# EAGLE board SparkFun_GPS_ZED-F9K-Panel (EAGLE 9.6.2), part 1 of 3
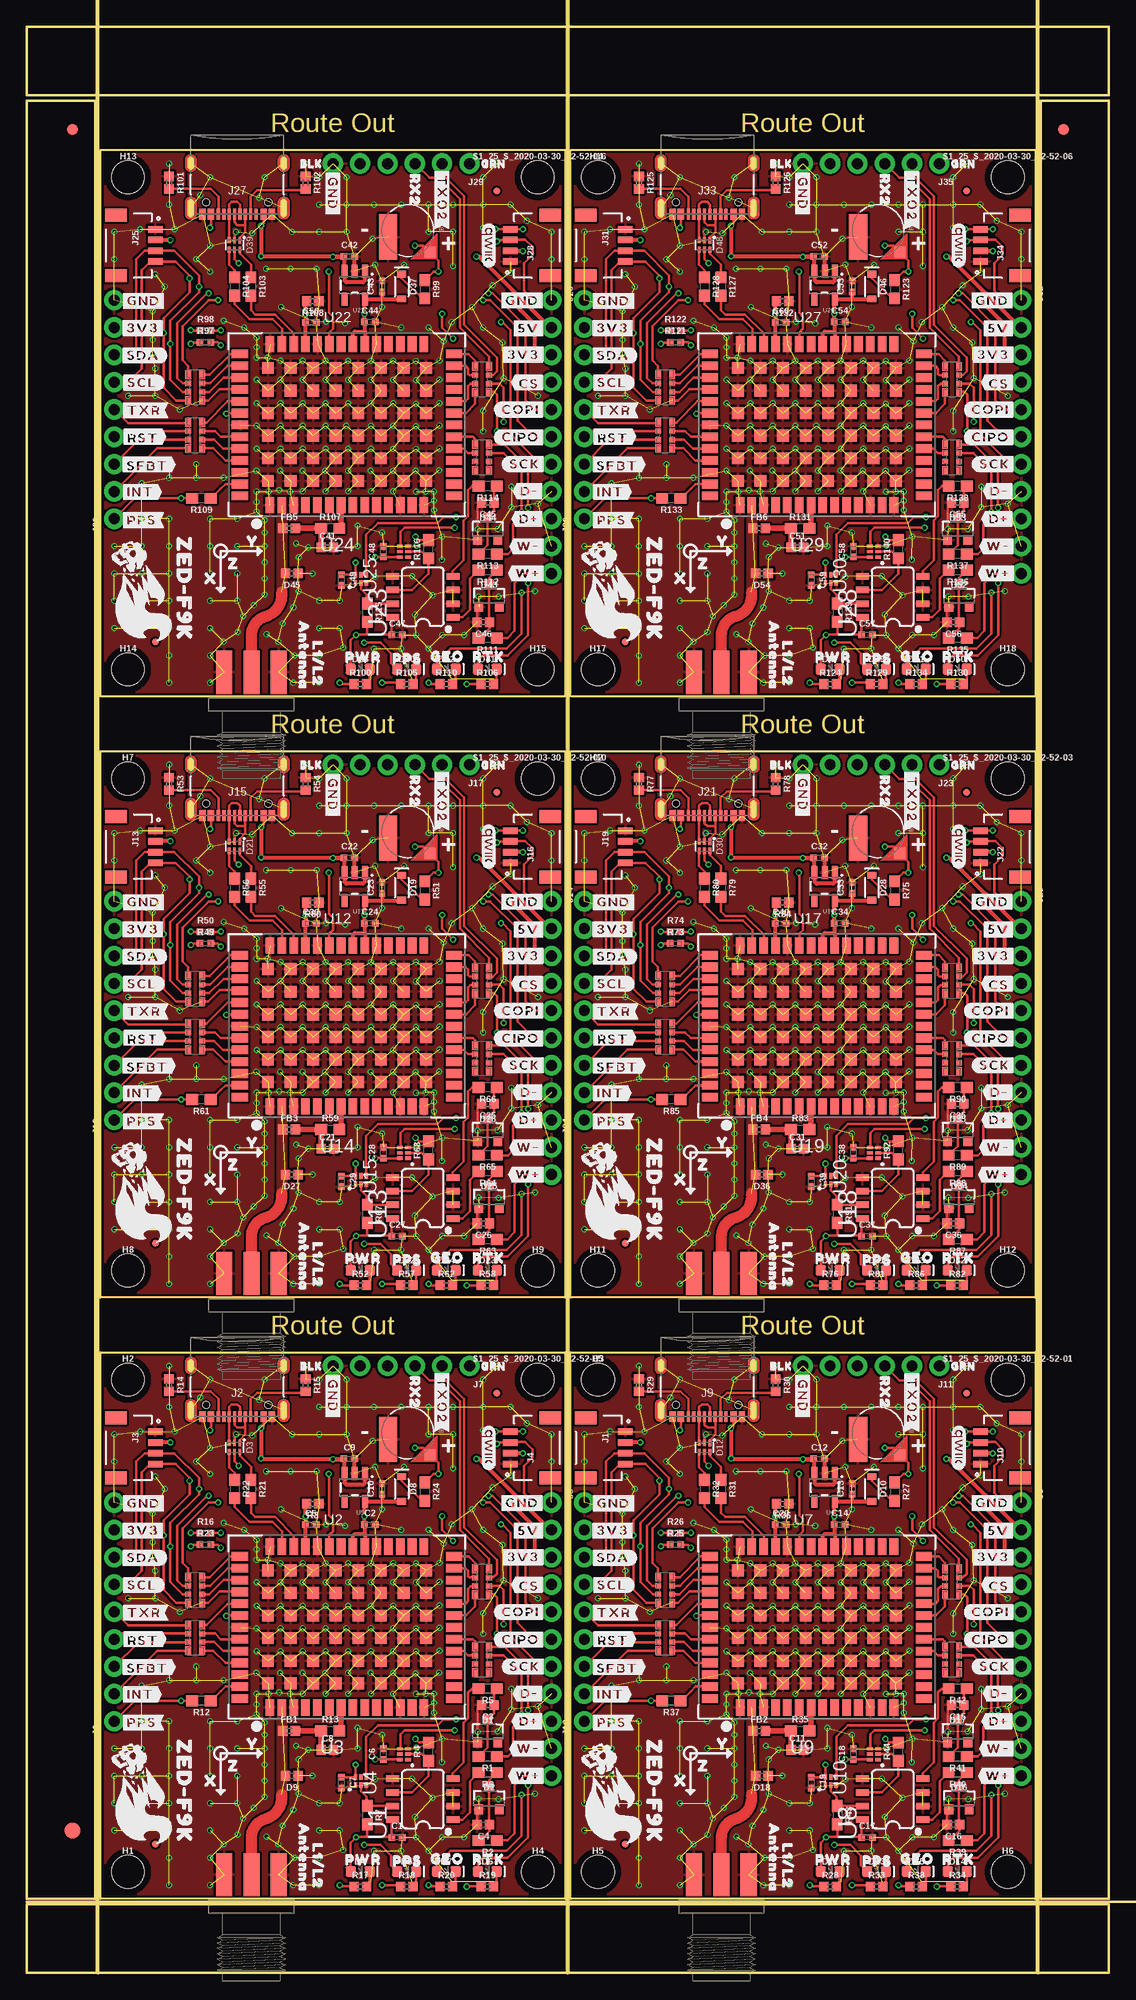
[diagram p0: board, top side]
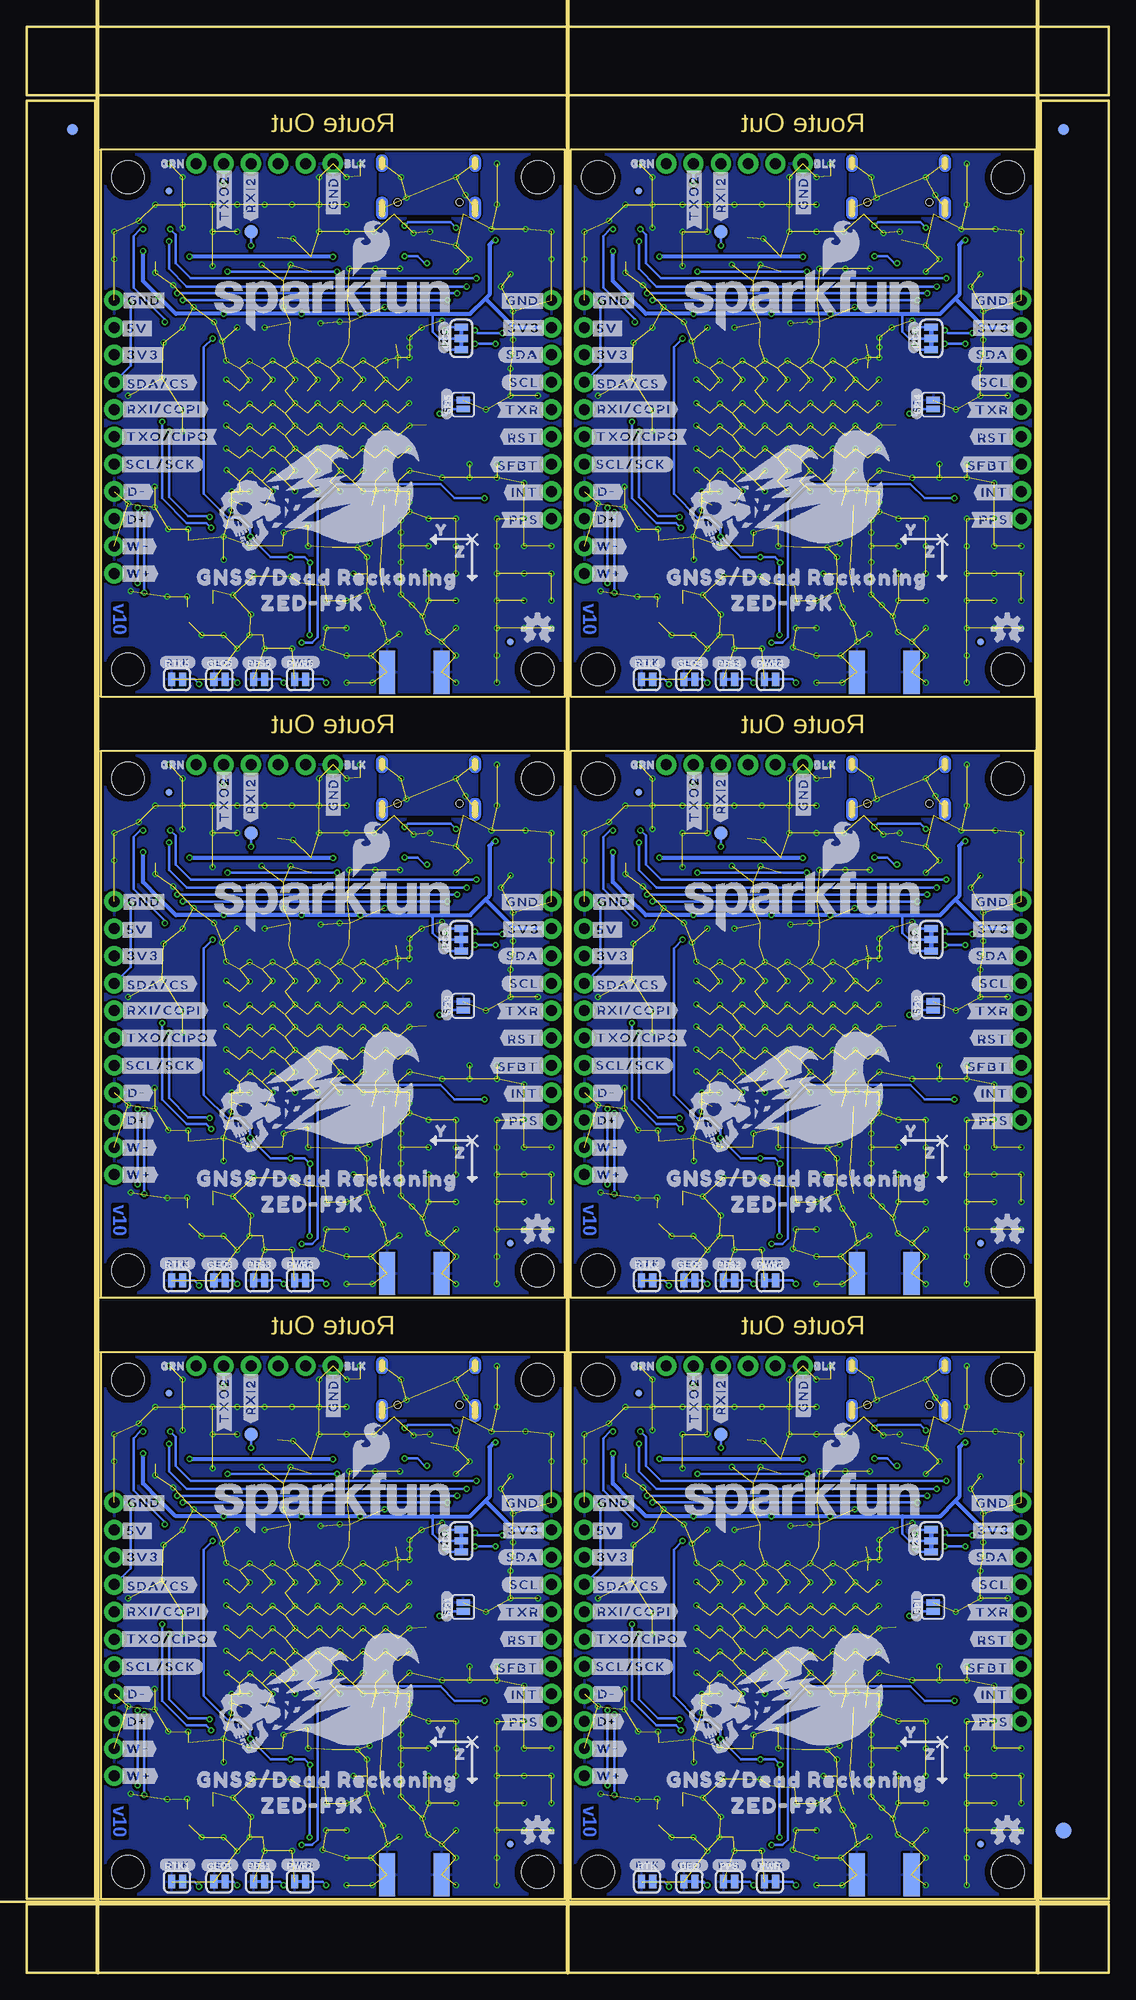
[diagram p1: board, bottom side, seen from below]

Size 100.58 x 180.85 mm. Coordinates in mm from the lower left corner, seen from the top.
Outline: 6.86,6.86 6.86,57.66 50.04,57.66 50.04,6.86 6.86,6.86
Outline: 50.55,6.86 50.55,57.66 93.73,57.66 93.73,6.86 50.55,6.86
Outline: 6.86,62.74 6.86,113.54 50.04,113.54 50.04,62.74 6.86,62.74
Outline: 50.55,62.74 50.55,113.54 93.73,113.54 93.73,62.74 50.55,62.74
Outline: 6.86,118.62 6.86,169.42 50.04,169.42 50.04,118.62 6.86,118.62
Outline: 50.55,118.62 50.55,169.42 93.73,169.42 93.73,118.62 50.55,118.62
Outline: 0,6.35 100.58,6.35 100.58,0 0,0 0,6.35
Outline: 94.23,173.99 100.58,173.99 100.58,6.86 94.23,6.86 94.23,173.99
Outline: 0,180.85 100.58,180.85 100.58,174.5 0,174.5 0,180.85
Outline: 0,173.99 6.35,173.99 6.35,6.86 0,6.86 0,173.99
Copper layers (1*16): Top 0.035mm / dielectric 1.5mm / Bottom 0.035mm
Design rules "SparkFun_GPS_ZED-F9K": minimum track width 5mil, minimum drill 0.3mm, track to track 5mil, track to pad 5mil, pad to pad 5mil, via to via 5mil, smd to smd 5mil, copper to edge 7mil, drill to drill 7mil, minimum pad ring 5mil, minimum via ring 5mil, stop-mask expansion 2.5mil, vias tented up to drill 25mil, thermal gap 10mil
Net classes: 1 Antenna: width 1 mm, clearance 0.3 mm
Milling: 4 lines

## Footprints (pad centres in the part's own frame; a part is rotated, then mirrored left to right if it is on the bottom)
STAND-OFF-TIGHT = hole 3.048: 0,0
ML414H_IV01E = smd 1 x 1: + 2.022,2.032 | smd 4.2 x 1.7: - 0.6,-1.85
0402-TIGHT = smd 0.6 x 0.6: 1 -0.5,0; 2 0.5,0
0402 = smd 0.85 x 0.9: 1 -0.58,0; 2 0.58,0
SOT23-3 = smd 0.8 x 0.9: 1 -0.95,-1; 2 0.95,-1; 3 0,1.1
SOT886 = smd 0.61 x 0.25: 1 -0.405,0.5 | smd 0.56 x 0.25: 2 -0.43,0; 3 -0.43,-0.5; 4 0.43,-0.5; 5 0.43,0; 6 0.43,0.5
LED-0603 = smd 1 x 1: A -0.877,0; C 0.877,0
SOD-323 = smd 0.63 x 0.83: A 1.15,0; C -1.15,0
SMA-EDGE = smd 1.5 x 4: GND@0 -2.54,0; GND@1 2.54,0; SIG 0,0 | smd 1.5 x 4 bottom: GND@2 -2.54,0; GND@3 2.54,0
FIDUCIAL-1X2 = smd 1 x 1: 1 0,0
FIDUCIAL-1.5X3 = smd 1.5 x 1.5: 1 0,0
FIDUCIAL-MICRO = smd 0.635 x 0.635: 1 0,0
SMT-JUMPER_2_NC_TRACE_SILK = smd 0.66 x 1.27: 1 -0.521,0; 2 0.521,0
SMT-JUMPER_3_2-NC_TRACE_SILK = smd 0.66 x 1.27: 1 -1.041,0; 2 0,0; 3 1.041,0
JST04_1MM_RA = smd 0.6 x 1.35: 1 -1.5,0; 2 -0.5,0; 3 0.5,0; 4 1.5,0 | smd 1.2 x 2: NC1 2.8,-3.675; NC2 -2.8,-3.675
USB-C-16P-2LAYER-PADS = smd 0.3 x 1: A5 -1.25,-0.34; A6 -0.25,-0.34; A7 0.25,-0.34; A8 1.25,-0.34; B5 1.75,-0.34; B6 0.75,-0.34; B7 -0.75,-0.34; B8 -1.75,-0.34 | smd 0.6 x 1: GND -3.225,-0.34; GND2 3.225,-0.34; VBUS1 -2.45,-0.34; VBUS2 2.45,-0.34 | drill 0.4 pad 0.6 long: SHLD1 -4.318,-0.915; SHLD2 4.318,-0.915; SHLD3 -4.318,-5.095; SHLD4 4.318,-5.095 | hole 0.65: -2.89,-1.445; 2.89,-1.445
1X11_NO_SILK = drill 1.016 pad 1.88: 1 0,0; 2 2.54,0; 3 5.08,0; 4 7.62,0; 5 10.16,0; 6 12.7,0; 7 15.24,0; 8 17.78,0; 9 20.32,0; 10 22.86,0; 11 25.4,0
1X09_NO_SILK = drill 1.016 pad 1.88: 1 0,0; 2 2.54,0; 3 5.08,0; 4 7.62,0; 5 10.16,0; 6 12.7,0; 7 15.24,0; 8 17.78,0; 9 20.32,0
1X06_NO_SILK = drill 1.016 pad 1.88: 1 0,0; 2 2.54,0; 3 5.08,0; 4 7.62,0; 5 10.16,0; 6 12.7,0
0603 = smd 1.1 x 1: 1 -0.85,0; 2 0.85,0
1206_RA = smd 0.8 x 0.55: P1 -1.2,-0.62; P4 1.2,-0.62; P5 1.2,0.68; P8 -1.2,0.68 | smd 0.5 x 0.55: P2 -0.4,-0.62; P3 0.4,-0.62; P6 0.4,0.68; P7 -0.4,0.68
SMT-JUMPER_2_NO_SILK = smd 0.635 x 1.27: 1 -0.406,0; 2 0.406,0
PAD.03X.05 = smd 1.27 x 1.27: 1 0,0
SO08 = smd 0.6 x 1.2: 1 -1.905,-2.8; 2 -0.635,-2.8; 3 0.635,-2.8; 4 1.905,-2.8; 5 1.905,2.8; 6 0.635,2.8; 7 -0.635,2.8; 8 -1.905,2.8
UBLOX_ZED_F9K = smd 1.1 x 1.1: G1 -7.312,-5.37; G2 -5.212,-5.37; G3 -3.112,-5.37; G4 -1.012,-5.37; G5 1.088,-5.37; G6 3.188,-5.37; G7 5.288,-5.37; G8 7.388,-5.37; G9 7.388,-3.27; G10 5.288,-3.27; G11 3.188,-3.27; G12 1.088,-3.27; G13 -1.012,-3.27; G14 -3.112,-3.27; G15 -5.212,-3.27; G16 -7.312,-3.27; G17 -7.312,-1.17; G18 -5.212,-1.17; G19 -3.112,-1.17; G20 -1.012,-1.17; G21 1.088,-1.17; G22 3.188,-1.17; G23 5.288,-1.17; G24 7.388,-1.17; G25 7.388,0.93; G26 5.288,0.93; G27 3.188,0.93; G28 1.088,0.93; G29 -1.012,0.93; G30 -3.112,0.93; G31 -5.212,0.93; G32 -7.312,0.93; G33 -7.312,3.03; G34 -5.212,3.03; G35 -3.112,3.03; G36 -1.012,3.03; G37 1.088,3.03; G38 3.188,3.03; G39 5.288,3.03; G40 7.388,3.03; G41 7.388,5.13; G42 5.288,5.13; G43 3.188,5.13; G44 1.088,5.13; G45 -1.012,5.13; G46 -3.112,5.13; G47 -5.212,5.13; G48 -7.312,5.13 | smd 0.8 x 1.5: P1 -7.112,-7.62; P2 -6.012,-7.62; P3 -4.912,-7.62; P4 -3.812,-7.62; P5 -2.712,-7.62; P6 -1.612,-7.62; P7 -0.512,-7.62; P8 0.588,-7.62; P9 1.688,-7.62; P10 2.788,-7.62; P11 3.888,-7.62; P12 4.988,-7.62; P13 6.088,-7.62; P14 7.188,-7.62; P28 7.188,7.33; P29 6.088,7.33; P30 4.988,7.33; P31 3.888,7.33; P32 2.788,7.33; P33 1.688,7.33; P34 0.588,7.33; P35 -0.512,7.33; P36 -1.612,7.33; P37 -2.712,7.33; P38 -3.812,7.33; P39 -4.912,7.33; P40 -6.012,7.33; P41 -7.112,7.33 | smd 1.5 x 0.8: P15 9.988,-6.77; P16 9.988,-5.67; P17 9.988,-4.57; P18 9.988,-3.47; P19 9.988,-2.37; P20 9.988,-1.27; P21 9.988,-0.17; P22 9.988,0.93; P23 9.988,2.03; P24 9.988,3.13; P25 9.988,4.23; P26 9.988,5.33; P27 9.988,6.43; P42 -9.912,6.43; P43 -9.912,5.33; P44 -9.912,4.23; P45 -9.912,3.13; P46 -9.912,2.03; P47 -9.912,0.93; P48 -9.912,-0.17; P49 -9.912,-1.27; P50 -9.912,-2.37; P51 -9.912,-3.47; P52 -9.912,-4.57; P53 -9.912,-5.67; P54 -9.912,-6.77
SIP6 = smd 0.3 x 0.52: P1 -0.508,-0.381; P2 -0.008,-0.381; P3 0.492,-0.381; P4 0.492,0.369; P5 -0.008,0.369; P6 -0.508,0.369
SOT23-5 = smd 0.55 x 1.2: 1 -0.95,-1.3; 2 0,-1.3; 3 0.95,-1.3; 4 0.95,1.3; 5 -0.95,1.3

## Placement (x,y rotation side)
$1_25_$_2020-03-30_22-52-01  STAND-OFFTIGHT  [STAND-OFF-TIGHT]  91.19,55.12 0 top
$1_25_$_2020-03-30_22-52-02  STAND-OFFTIGHT  [STAND-OFF-TIGHT]  47.5,111 0 top
$1_25_$_2020-03-30_22-52-03  STAND-OFFTIGHT  [STAND-OFF-TIGHT]  91.19,111 0 top
$1_25_$_2020-03-30_22-52-04  STAND-OFFTIGHT  [STAND-OFF-TIGHT]  47.5,166.88 0 top
$1_25_$_2020-03-30_22-52-05  STAND-OFFTIGHT  [STAND-OFF-TIGHT]  47.5,55.12 0 top
$1_25_$_2020-03-30_22-52-06  STAND-OFFTIGHT  [STAND-OFF-TIGHT]  91.19,166.88 0 top
BT1  ML414H_IV01E_BATTERY  [ML414H_IV01E]  35.43,50.16 270 top
BT2  ML414H_IV01E_BATTERY  [ML414H_IV01E]  79.12,50.16 270 top
BT3  ML414H_IV01E_BATTERY  [ML414H_IV01E]  35.43,106.05 270 top
BT4  ML414H_IV01E_BATTERY  [ML414H_IV01E]  79.12,106.05 270 top
BT5  ML414H_IV01E_BATTERY  [ML414H_IV01E]  35.43,161.93 270 top
BT6  ML414H_IV01E_BATTERY  [ML414H_IV01E]  79.12,161.93 270 top
C1  0.1uF  [0402-TIGHT]  34.42,12.57 0 top
C2  1.0uF  [0402-TIGHT]  31.88,41.66 0 top
C3  1nF  [0402]  42.84,24.87 180 top
C4  1nF  [0402]  42.43,13.75 180 top
C5  0.1uF  [0402-TIGHT]  26.39,41.63 0 top
C6  0.1uF  [0402-TIGHT]  33.15,20.32 90 top
C7  0.1uF  [0402-TIGHT]  29.24,17.66 270 top
C8  47pF  [0402]  27.94,20.7 0 top
C9  1.0uF  [0402-TIGHT]  29.97,47.75 0 top
C10  1.0uF  [0402-TIGHT]  33.02,44.96 90 top
C11  47pF  [0402]  71.63,20.7 0 top
C12  1.0uF  [0402-TIGHT]  73.66,47.75 0 top
C13  1.0uF  [0402-TIGHT]  76.71,44.96 90 top
C14  1.0uF  [0402-TIGHT]  75.56,41.66 0 top
C15  1nF  [0402]  86.53,24.87 180 top
C16  1nF  [0402]  86.12,13.75 180 top
C17  0.1uF  [0402-TIGHT]  78.11,12.57 0 top
C18  0.1uF  [0402-TIGHT]  76.84,20.32 90 top
C19  0.1uF  [0402-TIGHT]  72.92,17.66 270 top
C20  0.1uF  [0402-TIGHT]  70.08,41.63 0 top
C21  47pF  [0402]  27.94,76.58 0 top
C22  1.0uF  [0402-TIGHT]  29.97,103.63 0 top
C23  1.0uF  [0402-TIGHT]  33.02,100.84 90 top
C24  1.0uF  [0402-TIGHT]  31.88,97.54 0 top
C25  1nF  [0402]  42.84,80.75 180 top
C26  1nF  [0402]  42.43,69.63 180 top
C27  0.1uF  [0402-TIGHT]  34.42,68.45 0 top
C28  0.1uF  [0402-TIGHT]  33.15,76.2 90 top
C29  0.1uF  [0402-TIGHT]  29.24,73.54 270 top
C30  0.1uF  [0402-TIGHT]  26.39,97.51 0 top
C31  47pF  [0402]  71.63,76.58 0 top
C32  1.0uF  [0402-TIGHT]  73.66,103.63 0 top
C33  1.0uF  [0402-TIGHT]  76.71,100.84 90 top
C34  1.0uF  [0402-TIGHT]  75.56,97.54 0 top
C35  1nF  [0402]  86.53,80.75 180 top
C36  1nF  [0402]  86.12,69.63 180 top
C37  0.1uF  [0402-TIGHT]  78.11,68.45 0 top
C38  0.1uF  [0402-TIGHT]  76.84,76.2 90 top
C39  0.1uF  [0402-TIGHT]  72.92,73.54 270 top
C40  0.1uF  [0402-TIGHT]  70.08,97.51 0 top
C41  47pF  [0402]  27.94,132.46 0 top
C42  1.0uF  [0402-TIGHT]  29.97,159.51 0 top
C43  1.0uF  [0402-TIGHT]  33.02,156.72 90 top
C44  1.0uF  [0402-TIGHT]  31.88,153.42 0 top
C45  1nF  [0402]  42.84,136.63 180 top
C46  1nF  [0402]  42.43,125.51 180 top
C47  0.1uF  [0402-TIGHT]  34.42,124.33 0 top
C48  0.1uF  [0402-TIGHT]  33.15,132.08 90 top
C49  0.1uF  [0402-TIGHT]  29.24,129.42 270 top
C50  0.1uF  [0402-TIGHT]  26.39,153.39 0 top
C51  47pF  [0402]  71.63,132.46 0 top
C52  1.0uF  [0402-TIGHT]  73.66,159.51 0 top
C53  1.0uF  [0402-TIGHT]  76.71,156.72 90 top
C54  1.0uF  [0402-TIGHT]  75.56,153.42 0 top
C55  1nF  [0402]  86.53,136.63 180 top
C56  1nF  [0402]  86.12,125.51 180 top
C57  0.1uF  [0402-TIGHT]  78.11,124.33 0 top
C58  0.1uF  [0402-TIGHT]  76.84,132.08 90 top
C59  0.1uF  [0402-TIGHT]  72.92,129.42 270 top
C60  0.1uF  [0402-TIGHT]  70.08,153.39 0 top
D1  15V  [SOT23-3]  42.84,22.4 0 top
D2  15V  [SOT23-3]  42.97,16.17 0 top
D3  PRTR5V0U2F  [SOT886]  19.3,48.82 270 top
D4  RED  [LED-0603]  30.99,9.4 0 top
D5  BLUE  [LED-0603]  35.31,9.4 0 top
D6  BLUE  [LED-0603]  42.8,9.4 0 top
D7  BLUE  [LED-0603]  38.99,9.4 0 top
D8  0.5A/40V/420mV  [SOD-323]  34.85,44.96 270 top
D9  PESD0402  [0402]  24.64,18.29 180 top
D10  0.5A/40V/420mV  [SOD-323]  78.54,44.96 270 top
D11  RED  [LED-0603]  74.68,9.4 0 top
D12  PRTR5V0U2F  [SOT886]  62.99,48.82 270 top
D13  BLUE  [LED-0603]  78.99,9.4 0 top
D14  BLUE  [LED-0603]  86.49,9.4 0 top
D15  BLUE  [LED-0603]  82.68,9.4 0 top
D16  15V  [SOT23-3]  86.65,16.17 0 top
D17  15V  [SOT23-3]  86.53,22.4 0 top
D18  PESD0402  [0402]  68.33,18.29 180 top
D19  0.5A/40V/420mV  [SOD-323]  34.85,100.84 270 top
D20  RED  [LED-0603]  30.99,65.28 0 top
D21  PRTR5V0U2F  [SOT886]  19.3,104.7 270 top
D22  BLUE  [LED-0603]  35.31,65.28 0 top
D23  BLUE  [LED-0603]  42.8,65.28 0 top
D24  BLUE  [LED-0603]  38.99,65.28 0 top
D25  15V  [SOT23-3]  42.97,72.05 0 top
D26  15V  [SOT23-3]  42.84,78.28 0 top
D27  PESD0402  [0402]  24.64,74.17 180 top
D28  0.5A/40V/420mV  [SOD-323]  78.54,100.84 270 top
D29  RED  [LED-0603]  74.68,65.28 0 top
D30  PRTR5V0U2F  [SOT886]  62.99,104.7 270 top
D31  BLUE  [LED-0603]  78.99,65.28 0 top
D32  BLUE  [LED-0603]  86.49,65.28 0 top
D33  BLUE  [LED-0603]  82.68,65.28 0 top
D34  15V  [SOT23-3]  86.65,72.05 0 top
D35  15V  [SOT23-3]  86.53,78.28 0 top
D36  PESD0402  [0402]  68.33,74.17 180 top
D37  0.5A/40V/420mV  [SOD-323]  34.85,156.72 270 top
D38  RED  [LED-0603]  30.99,121.16 0 top
D39  PRTR5V0U2F  [SOT886]  19.3,160.58 270 top
D40  BLUE  [LED-0603]  35.31,121.16 0 top
D41  BLUE  [LED-0603]  42.8,121.16 0 top
D42  BLUE  [LED-0603]  38.99,121.16 0 top
D43  15V  [SOT23-3]  42.97,127.93 0 top
D44  15V  [SOT23-3]  42.84,134.16 0 top
D45  PESD0402  [0402]  24.64,130.05 180 top
D46  0.5A/40V/420mV  [SOD-323]  78.54,156.72 270 top
D47  RED  [LED-0603]  74.68,121.16 0 top
D48  PRTR5V0U2F  [SOT886]  62.99,160.58 270 top
D49  BLUE  [LED-0603]  78.99,121.16 0 top
D50  BLUE  [LED-0603]  86.49,121.16 0 top
D51  BLUE  [LED-0603]  82.68,121.16 0 top
D52  15V  [SOT23-3]  86.65,127.93 0 top
D53  15V  [SOT23-3]  86.53,134.16 0 top
D54  PESD0402  [0402]  68.33,130.05 180 top
E1  ANTENNA-SMA-GROUNDEDEDGE_SMA  [SMA-EDGE]  20.88,9.1 180 top
E2  ANTENNA-SMA-GROUNDEDEDGE_SMA  [SMA-EDGE]  64.57,9.1 180 top
E3  ANTENNA-SMA-GROUNDEDEDGE_SMA  [SMA-EDGE]  20.88,64.98 180 top
E4  ANTENNA-SMA-GROUNDEDEDGE_SMA  [SMA-EDGE]  64.57,64.98 180 top
E5  ANTENNA-SMA-GROUNDEDEDGE_SMA  [SMA-EDGE]  20.88,120.86 180 top
E6  ANTENNA-SMA-GROUNDEDEDGE_SMA  [SMA-EDGE]  64.57,120.86 180 top
E$1  [FIDUCIAL-1X2]  4.23,171.32 0 top
E$2  [FIDUCIAL-1X2]  4.23,171.32 0 bottom
E$3  [FIDUCIAL-1X2]  96.35,171.32 0 top
E$4  [FIDUCIAL-1X2]  96.35,171.32 0 bottom
E$5  [FIDUCIAL-1.5X3]  4.23,13.21 0 top
E$6  [FIDUCIAL-1.5X3]  4.23,13.21 0 bottom
FB1  120Ω  [0402]  24.38,22.48 0 top
FB2  120Ω  [0402]  68.07,22.48 0 top
FB3  120Ω  [0402]  24.38,78.36 0 top
FB4  120Ω  [0402]  68.07,78.36 0 top
FB5  120Ω  [0402]  24.38,134.24 0 top
FB6  120Ω  [0402]  68.07,134.24 0 top
FD1  FIDUCIALUFIDUCIAL  [FIDUCIAL-MICRO]  11.94,11.94 0 top
FD2  FIDUCIALUFIDUCIAL  [FIDUCIAL-MICRO]  11.94,11.94 0 bottom
FD3  FIDUCIALUFIDUCIAL  [FIDUCIAL-MICRO]  43.69,53.85 0 top
FD4  FIDUCIALUFIDUCIAL  [FIDUCIAL-MICRO]  43.69,53.85 0 bottom
FD5  FIDUCIALUFIDUCIAL  [FIDUCIAL-MICRO]  87.38,53.85 0 top
FD6  FIDUCIALUFIDUCIAL  [FIDUCIAL-MICRO]  55.63,11.94 0 bottom
FD7  FIDUCIALUFIDUCIAL  [FIDUCIAL-MICRO]  87.38,53.85 0 bottom
FD8  FIDUCIALUFIDUCIAL  [FIDUCIAL-MICRO]  55.63,11.94 0 top
FD9  FIDUCIALUFIDUCIAL  [FIDUCIAL-MICRO]  43.69,109.73 0 top
FD10  FIDUCIALUFIDUCIAL  [FIDUCIAL-MICRO]  11.94,67.82 0 bottom
FD11  FIDUCIALUFIDUCIAL  [FIDUCIAL-MICRO]  43.69,109.73 0 bottom
FD12  FIDUCIALUFIDUCIAL  [FIDUCIAL-MICRO]  11.94,67.82 0 top
FD13  FIDUCIALUFIDUCIAL  [FIDUCIAL-MICRO]  87.38,109.73 0 top
FD14  FIDUCIALUFIDUCIAL  [FIDUCIAL-MICRO]  55.63,67.82 0 bottom
FD15  FIDUCIALUFIDUCIAL  [FIDUCIAL-MICRO]  87.38,109.73 0 bottom
FD16  FIDUCIALUFIDUCIAL  [FIDUCIAL-MICRO]  55.63,67.82 0 top
FD17  FIDUCIALUFIDUCIAL  [FIDUCIAL-MICRO]  43.69,165.61 0 top
FD18  FIDUCIALUFIDUCIAL  [FIDUCIAL-MICRO]  11.94,123.7 0 bottom
FD19  FIDUCIALUFIDUCIAL  [FIDUCIAL-MICRO]  43.69,165.61 0 bottom
FD20  FIDUCIALUFIDUCIAL  [FIDUCIAL-MICRO]  11.94,123.7 0 top
FD21  FIDUCIALUFIDUCIAL  [FIDUCIAL-MICRO]  87.38,165.61 0 top
FD22  FIDUCIALUFIDUCIAL  [FIDUCIAL-MICRO]  55.63,123.7 0 bottom
FD23  FIDUCIALUFIDUCIAL  [FIDUCIAL-MICRO]  87.38,165.61 0 bottom
FD24  FIDUCIALUFIDUCIAL  [FIDUCIAL-MICRO]  55.63,123.7 0 top
GEO  JUMPER-SMT_2_NC_TRACE_SILK  [SMT-JUMPER_2_NC_TRACE_SILK]  38.99,8.46 0 bottom
GEO1  JUMPER-SMT_2_NC_TRACE_SILK  [SMT-JUMPER_2_NC_TRACE_SILK]  82.68,8.46 0 bottom
GEO2  JUMPER-SMT_2_NC_TRACE_SILK  [SMT-JUMPER_2_NC_TRACE_SILK]  38.99,64.34 0 bottom
GEO3  JUMPER-SMT_2_NC_TRACE_SILK  [SMT-JUMPER_2_NC_TRACE_SILK]  82.68,64.34 0 bottom
GEO4  JUMPER-SMT_2_NC_TRACE_SILK  [SMT-JUMPER_2_NC_TRACE_SILK]  38.99,120.22 0 bottom
GEO5  JUMPER-SMT_2_NC_TRACE_SILK  [SMT-JUMPER_2_NC_TRACE_SILK]  82.68,120.22 0 bottom
H1  STAND-OFFTIGHT  [STAND-OFF-TIGHT]  9.4,9.37 0 top
H2  STAND-OFFTIGHT  [STAND-OFF-TIGHT]  9.4,55.12 0 top
H3  STAND-OFFTIGHT  [STAND-OFF-TIGHT]  53.09,55.12 0 top
H4  STAND-OFFTIGHT  [STAND-OFF-TIGHT]  47.5,9.37 0 top
H5  STAND-OFFTIGHT  [STAND-OFF-TIGHT]  53.09,9.37 0 top
H6  STAND-OFFTIGHT  [STAND-OFF-TIGHT]  91.19,9.37 0 top
H7  STAND-OFFTIGHT  [STAND-OFF-TIGHT]  9.4,111 0 top
H8  STAND-OFFTIGHT  [STAND-OFF-TIGHT]  9.4,65.25 0 top
H9  STAND-OFFTIGHT  [STAND-OFF-TIGHT]  47.5,65.25 0 top
H10  STAND-OFFTIGHT  [STAND-OFF-TIGHT]  53.09,111 0 top
H11  STAND-OFFTIGHT  [STAND-OFF-TIGHT]  53.09,65.25 0 top
H12  STAND-OFFTIGHT  [STAND-OFF-TIGHT]  91.19,65.25 0 top
H13  STAND-OFFTIGHT  [STAND-OFF-TIGHT]  9.4,166.88 0 top
H14  STAND-OFFTIGHT  [STAND-OFF-TIGHT]  9.4,121.13 0 top
H15  STAND-OFFTIGHT  [STAND-OFF-TIGHT]  47.5,121.13 0 top
H16  STAND-OFFTIGHT  [STAND-OFF-TIGHT]  53.09,166.88 0 top
H17  STAND-OFFTIGHT  [STAND-OFF-TIGHT]  53.09,121.13 0 top
H18  STAND-OFFTIGHT  [STAND-OFF-TIGHT]  91.19,121.13 0 top
I2C  JUMPER-SMT_3_2-NC_TRACE_SILK  [SMT-JUMPER_3_2-NC_TRACE_SILK]  16.51,40.13 90 bottom
I2C1  JUMPER-SMT_3_2-NC_TRACE_SILK  [SMT-JUMPER_3_2-NC_TRACE_SILK]  60.2,40.13 90 bottom
I2C2  JUMPER-SMT_3_2-NC_TRACE_SILK  [SMT-JUMPER_3_2-NC_TRACE_SILK]  16.51,96.01 90 bottom
I2C3  JUMPER-SMT_3_2-NC_TRACE_SILK  [SMT-JUMPER_3_2-NC_TRACE_SILK]  60.2,96.01 90 bottom
I2C4  JUMPER-SMT_3_2-NC_TRACE_SILK  [SMT-JUMPER_3_2-NC_TRACE_SILK]  16.51,151.89 90 bottom
I2C5  JUMPER-SMT_3_2-NC_TRACE_SILK  [SMT-JUMPER_3_2-NC_TRACE_SILK]  60.2,151.89 90 bottom
J1  QWIIC_RIGHT_ANGLE  [JST04_1MM_RA]  55.63,48.77 270 top
J2  [USB-C-16P-2LAYER-PADS]  19.56,51.33 180 top
J3  QWIIC_RIGHT_ANGLE  [JST04_1MM_RA]  11.94,48.77 270 top
J4  QWIIC_RIGHT_ANGLE  [JST04_1MM_RA]  44.96,48.77 90 top
J5  [1X11_NO_SILK]  48.77,43.69 270 top
J6  [1X09_NO_SILK]  8.13,23.37 90 top
J7  [1X06_NO_SILK]  41.15,56.39 180 top
J8  [1X11_NO_SILK]  92.46,43.69 270 top
J9  [USB-C-16P-2LAYER-PADS]  63.25,51.33 180 top
J10  QWIIC_RIGHT_ANGLE  [JST04_1MM_RA]  88.65,48.77 90 top
J11  [1X06_NO_SILK]  84.84,56.39 180 top
J12  [1X09_NO_SILK]  51.82,23.37 90 top
J13  QWIIC_RIGHT_ANGLE  [JST04_1MM_RA]  11.94,104.65 270 top
J14  [1X11_NO_SILK]  48.77,99.57 270 top
J15  [USB-C-16P-2LAYER-PADS]  19.56,107.21 180 top
J16  QWIIC_RIGHT_ANGLE  [JST04_1MM_RA]  44.96,104.65 90 top
J17  [1X06_NO_SILK]  41.15,112.27 180 top
J18  [1X09_NO_SILK]  8.13,79.25 90 top
J19  QWIIC_RIGHT_ANGLE  [JST04_1MM_RA]  55.63,104.65 270 top
J20  [1X11_NO_SILK]  92.46,99.57 270 top
J21  [USB-C-16P-2LAYER-PADS]  63.25,107.21 180 top
J22  QWIIC_RIGHT_ANGLE  [JST04_1MM_RA]  88.65,104.65 90 top
J23  [1X06_NO_SILK]  84.84,112.27 180 top
J24  [1X09_NO_SILK]  51.82,79.25 90 top
J25  QWIIC_RIGHT_ANGLE  [JST04_1MM_RA]  11.94,160.53 270 top
J26  [1X11_NO_SILK]  48.77,155.45 270 top
J27  [USB-C-16P-2LAYER-PADS]  19.56,163.09 180 top
J28  QWIIC_RIGHT_ANGLE  [JST04_1MM_RA]  44.96,160.53 90 top
J29  [1X06_NO_SILK]  41.15,168.15 180 top
J30  [1X09_NO_SILK]  8.13,135.13 90 top
J31  QWIIC_RIGHT_ANGLE  [JST04_1MM_RA]  55.63,160.53 270 top
J32  [1X11_NO_SILK]  92.46,155.45 270 top
J33  [USB-C-16P-2LAYER-PADS]  63.25,163.09 180 top
J34  QWIIC_RIGHT_ANGLE  [JST04_1MM_RA]  88.65,160.53 90 top
J35  [1X06_NO_SILK]  84.84,168.15 180 top
J36  [1X09_NO_SILK]  51.82,135.13 90 top
LOGO1  OSHW-LOGOS  [OSHW-LOGO-S]  9.44,13.1 0 bottom
LOGO2  QWIIC_LOGO_4MM  [QWIIC_4MM]  42.93,48.77 270 top
LOGO3  SFE_LOGO_NAME_FLAME.2_INCH  [SFE_LOGO_NAME_FLAME_.2]  28.45,43.69 0 bottom
LOGO4  SFE_LOGO_NAME_FLAME.2_INCH  [SFE_LOGO_NAME_FLAME_.2]  72.14,43.69 0 bottom
LOGO5  QWIIC_LOGO_4MM  [QWIIC_4MM]  86.61,48.77 270 top
LOGO6  OSHW-LOGOS  [OSHW-LOGO-S]  53.13,13.1 0 bottom
LOGO7  SFE_LOGO_NAME_FLAME.2_INCH  [SFE_LOGO_NAME_FLAME_.2]  28.45,99.57 0 bottom
LOGO8  QWIIC_LOGO_4MM  [QWIIC_4MM]  42.93,104.65 270 top
LOGO9  OSHW-LOGOS  [OSHW-LOGO-S]  9.44,68.98 0 bottom
LOGO10  SFE_LOGO_NAME_FLAME.2_INCH  [SFE_LOGO_NAME_FLAME_.2]  72.14,99.57 0 bottom
LOGO11  QWIIC_LOGO_4MM  [QWIIC_4MM]  86.61,104.65 270 top
LOGO12  OSHW-LOGOS  [OSHW-LOGO-S]  53.13,68.98 0 bottom
LOGO13  SFE_LOGO_NAME_FLAME.2_INCH  [SFE_LOGO_NAME_FLAME_.2]  28.45,155.45 0 bottom
LOGO14  QWIIC_LOGO_4MM  [QWIIC_4MM]  42.93,160.53 270 top
LOGO15  OSHW-LOGOS  [OSHW-LOGO-S]  9.44,124.86 0 bottom
LOGO16  SFE_LOGO_NAME_FLAME.2_INCH  [SFE_LOGO_NAME_FLAME_.2]  72.14,155.45 0 bottom
LOGO17  QWIIC_LOGO_4MM  [QWIIC_4MM]  86.61,160.53 270 top
LOGO18  OSHW-LOGOS  [OSHW-LOGO-S]  53.13,124.86 0 bottom
PPS  JUMPER-SMT_2_NC_TRACE_SILK  [SMT-JUMPER_2_NC_TRACE_SILK]  35.31,8.46 0 bottom
PPS1  JUMPER-SMT_2_NC_TRACE_SILK  [SMT-JUMPER_2_NC_TRACE_SILK]  78.99,8.46 0 bottom
PPS2  JUMPER-SMT_2_NC_TRACE_SILK  [SMT-JUMPER_2_NC_TRACE_SILK]  35.31,64.34 0 bottom
PPS3  JUMPER-SMT_2_NC_TRACE_SILK  [SMT-JUMPER_2_NC_TRACE_SILK]  78.99,64.34 0 bottom
PPS4  JUMPER-SMT_2_NC_TRACE_SILK  [SMT-JUMPER_2_NC_TRACE_SILK]  35.31,120.22 0 bottom
PPS5  JUMPER-SMT_2_NC_TRACE_SILK  [SMT-JUMPER_2_NC_TRACE_SILK]  78.99,120.22 0 bottom
PWR  JUMPER-SMT_2_NC_TRACE_SILK  [SMT-JUMPER_2_NC_TRACE_SILK]  31.5,8.46 0 bottom
PWR1  JUMPER-SMT_2_NC_TRACE_SILK  [SMT-JUMPER_2_NC_TRACE_SILK]  75.18,8.46 0 bottom
PWR2  JUMPER-SMT_2_NC_TRACE_SILK  [SMT-JUMPER_2_NC_TRACE_SILK]  31.5,64.34 0 bottom
PWR3  JUMPER-SMT_2_NC_TRACE_SILK  [SMT-JUMPER_2_NC_TRACE_SILK]  75.18,64.34 0 bottom
PWR4  JUMPER-SMT_2_NC_TRACE_SILK  [SMT-JUMPER_2_NC_TRACE_SILK]  31.5,120.22 0 bottom
PWR5  JUMPER-SMT_2_NC_TRACE_SILK  [SMT-JUMPER_2_NC_TRACE_SILK]  75.18,120.22 0 bottom
R1  3.3k  [0603]  42.84,20.09 180 top
R2  3.3k  [0603]  42.84,12.28 180 top
R3  100K  [0402]  26.57,43.59 180 top
R4  910  [0603]  37.33,20.54 90 top
R5  470  [0603]  42.84,26.39 180 top
R6  470  [0603]  42.84,18.59 180 top
R7  910  [0603]  31.64,14.64 270 top
R8  33  [1206_RA]  15.62,31.12 270 top
R9  33  [1206_RA]  15.62,35.56 270 top
R10  33  [1206_RA]  42.29,36.32 270 top
R11  33  [1206_RA]  42.29,29.08 270 top
R12  33  [0603]  16.22,25.27 180 top
R13  33  [0603]  28.19,22.48 0 top
R14  5.1k  [0402]  13.21,54.61 270 top
R15  5.1k  [0402]  25.91,54.61 270 top
R16  4.7k  [0402-TIGHT]  16.61,40.86 0 top
R17  1KOHM-0402-1/16W-1%  [0402]  30.99,8 0 top
R18  1KOHM-0402-1/16W-1%  [0402]  35.31,8 0 top
R19  1KOHM-0402-1/16W-1%  [0402]  42.8,8 0 top
R20  1KOHM-0402-1/16W-1%  [0402]  38.99,8 0 top
R21  27  [0603]  20.83,44.96 270 top
R22  27  [0603]  19.3,44.96 270 top
R23  4.7k  [0402-TIGHT]  16.61,39.78 0 top
R24  3.3k  [0603]  36.98,44.7 270 top
R25  4.7k  [0402-TIGHT]  60.29,39.78 0 top
R26  4.7k  [0402-TIGHT]  60.29,40.86 0 top
R27  3.3k  [0603]  80.67,44.7 270 top
R28  1KOHM-0402-1/16W-1%  [0402]  74.68,8 0 top
R29  5.1k  [0402]  56.9,54.61 270 top
R30  5.1k  [0402]  69.6,54.61 270 top
R31  27  [0603]  64.52,44.96 270 top
R32  27  [0603]  62.99,44.96 270 top
R33  1KOHM-0402-1/16W-1%  [0402]  78.99,8 0 top
R34  1KOHM-0402-1/16W-1%  [0402]  86.49,8 0 top
R35  33  [0603]  71.88,22.48 0 top
R36  100K  [0402]  70.26,43.59 180 top
R37  33  [0603]  59.91,25.27 180 top
R38  1KOHM-0402-1/16W-1%  [0402]  82.68,8 0 top
R39  3.3k  [0603]  86.53,12.28 180 top
R40  470  [0603]  86.53,18.59 180 top
R41  3.3k  [0603]  86.53,20.09 180 top
R42  470  [0603]  86.53,26.39 180 top
R43  910  [0603]  75.33,14.64 270 top
R44  910  [0603]  81.02,20.54 90 top
R45  33  [1206_RA]  59.31,35.56 270 top
R46  33  [1206_RA]  59.31,31.12 270 top
R47  33  [1206_RA]  85.98,36.32 270 top
R48  33  [1206_RA]  85.98,29.08 270 top
R49  4.7k  [0402-TIGHT]  16.61,95.66 0 top
R50  4.7k  [0402-TIGHT]  16.61,96.74 0 top
R51  3.3k  [0603]  36.98,100.58 270 top
R52  1KOHM-0402-1/16W-1%  [0402]  30.99,63.88 0 top
R53  5.1k  [0402]  13.21,110.49 270 top
R54  5.1k  [0402]  25.91,110.49 270 top
R55  27  [0603]  20.83,100.84 270 top
R56  27  [0603]  19.3,100.84 270 top
R57  1KOHM-0402-1/16W-1%  [0402]  35.31,63.88 0 top
R58  1KOHM-0402-1/16W-1%  [0402]  42.8,63.88 0 top
R59  33  [0603]  28.19,78.36 0 top
R60  100K  [0402]  26.57,99.47 180 top
R61  33  [0603]  16.22,81.15 180 top
R62  1KOHM-0402-1/16W-1%  [0402]  38.99,63.88 0 top
R63  3.3k  [0603]  42.84,68.16 180 top
R64  470  [0603]  42.84,74.47 180 top
R65  3.3k  [0603]  42.84,75.97 180 top
R66  470  [0603]  42.84,82.27 180 top
R67  910  [0603]  31.64,70.52 270 top
R68  910  [0603]  37.33,76.42 90 top
R69  33  [1206_RA]  15.62,91.44 270 top
R70  33  [1206_RA]  15.62,87 270 top
R71  33  [1206_RA]  42.29,92.2 270 top
R72  33  [1206_RA]  42.29,84.96 270 top
R73  4.7k  [0402-TIGHT]  60.29,95.66 0 top
R74  4.7k  [0402-TIGHT]  60.29,96.74 0 top
R75  3.3k  [0603]  80.67,100.58 270 top
R76  1KOHM-0402-1/16W-1%  [0402]  74.68,63.88 0 top
R77  5.1k  [0402]  56.9,110.49 270 top
R78  5.1k  [0402]  69.6,110.49 270 top
R79  27  [0603]  64.52,100.84 270 top
R80  27  [0603]  62.99,100.84 270 top
R81  1KOHM-0402-1/16W-1%  [0402]  78.99,63.88 0 top
R82  1KOHM-0402-1/16W-1%  [0402]  86.49,63.88 0 top
R83  33  [0603]  71.88,78.36 0 top
R84  100K  [0402]  70.26,99.47 180 top
R85  33  [0603]  59.91,81.15 180 top
R86  1KOHM-0402-1/16W-1%  [0402]  82.68,63.88 0 top
R87  3.3k  [0603]  86.53,68.16 180 top
R88  470  [0603]  86.53,74.47 180 top
R89  3.3k  [0603]  86.53,75.97 180 top
R90  470  [0603]  86.53,82.27 180 top
R91  910  [0603]  75.33,70.52 270 top
R92  910  [0603]  81.02,76.42 90 top
R93  33  [1206_RA]  59.31,91.44 270 top
R94  33  [1206_RA]  59.31,87 270 top
R95  33  [1206_RA]  85.98,92.2 270 top
R96  33  [1206_RA]  85.98,84.96 270 top
R97  4.7k  [0402-TIGHT]  16.61,151.54 0 top
R98  4.7k  [0402-TIGHT]  16.61,152.62 0 top
R99  3.3k  [0603]  36.98,156.46 270 top
R100  1KOHM-0402-1/16W-1%  [0402]  30.99,119.76 0 top
R101  5.1k  [0402]  13.21,166.37 270 top
R102  5.1k  [0402]  25.91,166.37 270 top
R103  27  [0603]  20.83,156.72 270 top
R104  27  [0603]  19.3,156.72 270 top
R105  1KOHM-0402-1/16W-1%  [0402]  35.31,119.76 0 top
R106  1KOHM-0402-1/16W-1%  [0402]  42.8,119.76 0 top
R107  33  [0603]  28.19,134.24 0 top
R108  100K  [0402]  26.57,155.35 180 top
R109  33  [0603]  16.22,137.03 180 top
R110  1KOHM-0402-1/16W-1%  [0402]  38.99,119.76 0 top
R111  3.3k  [0603]  42.84,124.04 180 top
R112  470  [0603]  42.84,130.35 180 top
R113  3.3k  [0603]  42.84,131.85 180 top
R114  470  [0603]  42.84,138.15 180 top
R115  910  [0603]  31.64,126.4 270 top
R116  910  [0603]  37.33,132.3 90 top
R117  33  [1206_RA]  15.62,147.32 270 top
R118  33  [1206_RA]  15.62,142.88 270 top
R119  33  [1206_RA]  42.29,148.08 270 top
R120  33  [1206_RA]  42.29,140.84 270 top
R121  4.7k  [0402-TIGHT]  60.29,151.54 0 top
R122  4.7k  [0402-TIGHT]  60.29,152.62 0 top
R123  3.3k  [0603]  80.67,156.46 270 top
R124  1KOHM-0402-1/16W-1%  [0402]  74.68,119.76 0 top
R125  5.1k  [0402]  56.9,166.37 270 top
R126  5.1k  [0402]  69.6,166.37 270 top
R127  27  [0603]  64.52,156.72 270 top
R128  27  [0603]  62.99,156.72 270 top
R129  1KOHM-0402-1/16W-1%  [0402]  78.99,119.76 0 top
R130  1KOHM-0402-1/16W-1%  [0402]  86.49,119.76 0 top
R131  33  [0603]  71.88,134.24 0 top
R132  100K  [0402]  70.26,155.35 180 top
R133  33  [0603]  59.91,137.03 180 top
R134  1KOHM-0402-1/16W-1%  [0402]  82.68,119.76 0 top
R135  3.3k  [0603]  86.53,124.04 180 top
R136  470  [0603]  86.53,130.35 180 top
R137  3.3k  [0603]  86.53,131.85 180 top
R138  470  [0603]  86.53,138.15 180 top
R139  910  [0603]  75.33,126.4 270 top
R140  910  [0603]  81.02,132.3 90 top
R141  33  [1206_RA]  59.31,147.32 270 top
R142  33  [1206_RA]  59.31,142.88 270 top
R143  33  [1206_RA]  85.98,148.08 270 top
R144  33  [1206_RA]  85.98,140.84 270 top
RTK  JUMPER-SMT_2_NC_TRACE_SILK  [SMT-JUMPER_2_NC_TRACE_SILK]  42.93,8.46 0 bottom
RTK1  JUMPER-SMT_2_NC_TRACE_SILK  [SMT-JUMPER_2_NC_TRACE_SILK]  86.61,8.46 0 bottom
RTK2  JUMPER-SMT_2_NC_TRACE_SILK  [SMT-JUMPER_2_NC_TRACE_SILK]  42.93,64.34 0 bottom
RTK3  JUMPER-SMT_2_NC_TRACE_SILK  [SMT-JUMPER_2_NC_TRACE_SILK]  86.61,64.34 0 bottom
RTK4  JUMPER-SMT_2_NC_TRACE_SILK  [SMT-JUMPER_2_NC_TRACE_SILK]  42.93,120.22 0 bottom
RTK5  JUMPER-SMT_2_NC_TRACE_SILK  [SMT-JUMPER_2_NC_TRACE_SILK]  86.61,120.22 0 bottom
SPI  JUMPER-SMT_2_NO_SILK  [SMT-JUMPER_2_NO_SILK]  16.33,33.99 90 bottom
SPI1  JUMPER-SMT_2_NO_SILK  [SMT-JUMPER_2_NO_SILK]  60.02,33.99 90 bottom
SPI2  JUMPER-SMT_2_NO_SILK  [SMT-JUMPER_2_NO_SILK]  16.33,89.87 90 bottom
SPI3  JUMPER-SMT_2_NO_SILK  [SMT-JUMPER_2_NO_SILK]  60.02,89.87 90 bottom
SPI4  JUMPER-SMT_2_NO_SILK  [SMT-JUMPER_2_NO_SILK]  16.33,145.75 90 bottom
SPI5  JUMPER-SMT_2_NO_SILK  [SMT-JUMPER_2_NO_SILK]  60.02,145.75 90 bottom
TP1  TEST-POINT3X5  [PAD.03X.05]  36.07,50.04 0 bottom
TP2  TEST-POINT3X5  [PAD.03X.05]  79.76,50.04 0 bottom
TP3  TEST-POINT3X5  [PAD.03X.05]  36.07,105.92 0 bottom
TP4  TEST-POINT3X5  [PAD.03X.05]  79.76,105.92 0 bottom
TP5  TEST-POINT3X5  [PAD.03X.05]  36.07,161.8 0 bottom
TP6  TEST-POINT3X5  [PAD.03X.05]  79.76,161.8 0 bottom
U1  DUAL-OPTO_HCPL-073LSOIC-8  [SO08]  36.8,16.11 90 top
U2  U-BLOX_ZED_F9K  [UBLOX_ZED_F9K]  29.72,32.26 0 top
U3  UHS_INVERTER_SCHMITT_TRIGGERSIP6  [SIP6]  31.05,17.8 0 top
U4  UHS_INVERTER_SCHMITT_TRIGGERSIP6  [SIP6]  35.05,20.32 90 top
U5  3.3V  [SOT23-5]  30.48,45.08 180 top
U6  3.3V  [SOT23-5]  74.17,45.08 180 top
U7  U-BLOX_ZED_F9K  [UBLOX_ZED_F9K]  73.41,32.26 0 top
U8  DUAL-OPTO_HCPL-073LSOIC-8  [SO08]  80.49,16.11 90 top
U9  UHS_INVERTER_SCHMITT_TRIGGERSIP6  [SIP6]  74.74,17.8 0 top
U10  UHS_INVERTER_SCHMITT_TRIGGERSIP6  [SIP6]  78.74,20.32 90 top
U11  3.3V  [SOT23-5]  30.48,100.97 180 top
U12  U-BLOX_ZED_F9K  [UBLOX_ZED_F9K]  29.72,88.14 0 top
U13  DUAL-OPTO_HCPL-073LSOIC-8  [SO08]  36.8,71.99 90 top
U14  UHS_INVERTER_SCHMITT_TRIGGERSIP6  [SIP6]  31.05,73.68 0 top
U15  UHS_INVERTER_SCHMITT_TRIGGERSIP6  [SIP6]  35.05,76.2 90 top
U16  3.3V  [SOT23-5]  74.17,100.97 180 top
U17  U-BLOX_ZED_F9K  [UBLOX_ZED_F9K]  73.41,88.14 0 top
U18  DUAL-OPTO_HCPL-073LSOIC-8  [SO08]  80.49,71.99 90 top
U19  UHS_INVERTER_SCHMITT_TRIGGERSIP6  [SIP6]  74.74,73.68 0 top
U20  UHS_INVERTER_SCHMITT_TRIGGERSIP6  [SIP6]  78.74,76.2 90 top
U21  3.3V  [SOT23-5]  30.48,156.84 180 top
U22  U-BLOX_ZED_F9K  [UBLOX_ZED_F9K]  29.72,144.02 0 top
U23  DUAL-OPTO_HCPL-073LSOIC-8  [SO08]  36.8,127.87 90 top
U24  UHS_INVERTER_SCHMITT_TRIGGERSIP6  [SIP6]  31.05,129.56 0 top
U25  UHS_INVERTER_SCHMITT_TRIGGERSIP6  [SIP6]  35.05,132.08 90 top
U26  3.3V  [SOT23-5]  74.17,156.84 180 top
U27  U-BLOX_ZED_F9K  [UBLOX_ZED_F9K]  73.41,144.02 0 top
U28  DUAL-OPTO_HCPL-073LSOIC-8  [SO08]  80.49,127.87 90 top
U29  UHS_INVERTER_SCHMITT_TRIGGERSIP6  [SIP6]  74.74,129.56 0 top
U30  UHS_INVERTER_SCHMITT_TRIGGERSIP6  [SIP6]  78.74,132.08 90 top
U$1  [PWR22]  31.26,10.49 0 top
U$2  [PPS21]  35.36,10.36 0 top
U$3  [GEO23]  39.09,10.56 0 top
U$4  [RTK24]  42.9,10.53 0 top
U$5  [#W##16]  46.56,18.29 0 top
U$6  [#W##15]  46.6,20.82 0 top
U$7  [#3V3#6]  46.12,38.6 0 top
U$8  [#D##13]  46.65,23.36 0 top
U$9  [#D##14]  46.71,25.94 0 top
U$10  [#SCK#12]  46.27,28.45 0 top
U$11  [#CIPO#10]  45.89,30.95 0 top
U$12  [#COPI#9]  45.89,33.52 0 top
U$13  [##CS##11]  46.66,36.04 0 top
U$14  [#3V3#6]  46.15,38.63 0 top
U$15  [#5V#1]  46.64,41.07 0 top
U$16  [#GND#0]  46.03,43.65 0 top
U$17  [#GND#0]  28.43,53.61 270 top
U$18  [#TXO2#20]  38.58,53.15 270 top
U$19  [DEAD#RECKONING#GPS#BOARD#SILK#FINAL#JPG]  29.68,26.12 0 bottom
U$20  [DEAD#RECKONING#GPS#BOARD#SILK#FINAL#JPG]  10.73,16.61 270 top
U$21  [RX224]  36.07,53.9 270 top
U$22  [#3V3#6]  46.13,38.6 0 bottom
U$23  [BLK225]  26.43,56.37 0 top
U$24  [#5V#1]  46.63,41.06 0 bottom
U$25  [#GND#0]  46.03,43.65 0 bottom
U$26  [GRN226]  43.37,56.35 0 top
U$27  [#SDA##CS##10]  44.67,36.04 0 bottom
U$28  [#RXI#COPI#8]  44.16,33.55 0 bottom
U$29  [DEAD#RECKONING#GPS#BOARD#SILK#FINAL#JPG]  73.37,26.12 0 bottom
U$30  [#SCL#SCK#12]  44.46,28.42 0 bottom
U$31  [#D##6]  46.68,23.32 0 bottom
U$32  [X1]  15.59,17.83 0 top
U$33  [#D##7]  46.69,25.88 0 bottom
U$34  [#W##4]  46.51,18.27 0 bottom
U$35  [#W##5]  46.57,20.8 0 bottom
U$36  [#GND#0]  10.83,43.63 0 bottom
U$37  [#3V3#6]  10.73,41.1 0 bottom
U$38  [#SDA#6]  10.83,38.61 0 bottom
U$39  [#SCL#7]  10.66,36.04 0 bottom
U$40  [#TXR#3]  10.87,33.49 0 bottom
U$41  [##RST##16]  10.77,31.01 0 bottom
U$42  [##SFBT##17]  11.21,28.43 0 bottom
U$43  [#INT#8]  10.6,25.82 0 bottom
U$44  [#GND#0]  10.84,43.62 0 top
U$45  [#PPS#0]  10.71,23.27 0 bottom
U$46  [#RTK#25]  42.89,10.03 0 bottom
U$47  [#GEO#24]  38.96,9.98 0 bottom
U$48  [#PPS#21]  35.28,9.99 0 bottom
U$49  [L1#L2229]  27.02,9.91 270 top
U$50  [Y2]  19.53,21.26 0 top
U$51  [#PWR#23]  31.46,10.03 0 bottom
U$52  [Y2]  19.81,22.35 0 bottom
U$53  [#SPI#22]  17.86,34.05 90 bottom
U$54  [#I2C#23]  18.12,40.23 90 bottom
U$55  [#3V3#6]  10.76,41.09 0 top
U$56  [#SDA#12]  10.81,38.55 0 top
U$57  [Z0]  18.03,20.32 0 bottom
U$58  [#GND#0]  28.4,53.61 90 bottom
U$59  [#RXI2#227]  36.08,53.49 90 bottom
U$60  [#TXO2#1]  38.56,53.18 90 bottom
U$61  [BLK227]  26.37,56.37 0 bottom
U$62  [ANTENNA229]  25.75,10.69 270 top
U$63  [Z0]  17.75,19.23 0 top
U$64  [GRN228]  43.32,56.36 0 bottom
U$65  [GNSS#DEAD_RECKONING230]  29,17.92 0 bottom
U$66  [#SCL#13]  10.71,36.02 0 top
U$67  [#TXR#19]  10.88,33.45 0 top
U$68  [##RST##17]  10.81,31 0 top
U$69  [##SFBT##18]  11.21,28.41 0 top
U$70  [#INT#14]  10.57,25.87 0 top
U$71  [#PPS#20]  10.67,23.24 0 top
U$72  [ZED#F9K230]  30.35,15.53 0 bottom
U$73  [ZED#F9K230]  14.62,16.86 270 top
U$74  [#TXO#CIPO#9]  43.81,30.99 0 bottom
U$75  [DEAD#RECKONING#GPS#BOARD#SILK#FINAL#JPG]  54.41,16.61 270 top
U$76  [X1]  59.28,17.83 0 top
U$77  [Y2]  63.22,21.26 0 top
U$78  [Y2]  63.5,22.35 0 bottom
U$79  [Z0]  61.72,20.32 0 bottom
U$80  [Z0]  61.44,19.23 0 top
U$81  [PWR22]  74.95,10.49 0 top
U$82  [PPS21]  79.05,10.36 0 top
U$83  [GEO23]  82.78,10.56 0 top
U$84  [RTK24]  86.59,10.53 0 top
U$85  [#W##16]  90.25,18.29 0 top
U$86  [#W##15]  90.29,20.82 0 top
U$87  [#D##13]  90.34,23.36 0 top
U$88  [#D##14]  90.4,25.94 0 top
U$89  [#SCK#12]  89.96,28.45 0 top
U$90  [#CIPO#10]  89.58,30.95 0 top
U$91  [#COPI#9]  89.58,33.52 0 top
U$92  [#3V3#6]  89.84,38.63 0 top
U$93  [#5V#1]  90.33,41.07 0 top
U$94  [#GND#0]  89.72,43.65 0 top
U$95  [#GND#0]  72.12,53.61 270 top
U$96  [#TXO2#20]  82.27,53.15 270 top
U$97  [RX224]  79.76,53.9 270 top
U$98  [BLK225]  70.11,56.37 0 top
U$99  [GRN226]  87.06,56.35 0 top
U$100  [#GND#0]  54.53,43.62 0 top
U$101  [#3V3#6]  54.45,41.09 0 top
U$102  [#SDA#12]  54.5,38.55 0 top
U$103  [#SCL#13]  54.4,36.02 0 top
U$104  [#TXR#19]  54.57,33.45 0 top
U$105  [##RST##17]  54.5,31 0 top
U$106  [##SFBT##18]  54.9,28.41 0 top
U$107  [#INT#14]  54.26,25.87 0 top
U$108  [##CS##11]  90.35,36.04 0 top
U$109  [#3V3#6]  89.81,38.6 0 top
U$110  [#3V3#6]  89.82,38.6 0 bottom
U$111  [#5V#1]  90.32,41.06 0 bottom
U$112  [#GND#0]  89.72,43.65 0 bottom
U$113  [#SDA##CS##10]  88.36,36.04 0 bottom
U$114  [#RXI#COPI#8]  87.85,33.55 0 bottom
U$115  [#SCL#SCK#12]  88.15,28.42 0 bottom
U$116  [#D##6]  90.37,23.32 0 bottom
U$117  [#D##7]  90.38,25.88 0 bottom
U$118  [#W##4]  90.2,18.27 0 bottom
U$119  [#W##5]  90.26,20.8 0 bottom
U$120  [#GND#0]  54.52,43.63 0 bottom
U$121  [#3V3#6]  54.42,41.1 0 bottom
U$122  [#SDA#6]  54.52,38.61 0 bottom
U$123  [#SCL#7]  54.35,36.04 0 bottom
U$124  [#TXR#3]  54.56,33.49 0 bottom
U$125  [##RST##16]  54.46,31.01 0 bottom
U$126  [##SFBT##17]  54.9,28.43 0 bottom
U$127  [#INT#8]  54.29,25.82 0 bottom
U$128  [#PPS#0]  54.4,23.27 0 bottom
U$129  [#RTK#25]  86.58,10.03 0 bottom
U$130  [#GEO#24]  82.65,9.98 0 bottom
U$131  [#PPS#21]  78.97,9.99 0 bottom
U$132  [#PWR#23]  75.15,10.03 0 bottom
U$133  [#SPI#22]  61.55,34.05 90 bottom
U$134  [#I2C#23]  61.81,40.23 90 bottom
U$135  [#RXI2#227]  79.77,53.49 90 bottom
U$136  [#TXO2#1]  82.25,53.18 90 bottom
U$137  [#GND#0]  72.09,53.61 90 bottom
U$138  [BLK227]  70.06,56.37 0 bottom
U$139  [GRN228]  87.01,56.36 0 bottom
U$140  [GNSS#DEAD_RECKONING230]  72.69,17.92 0 bottom
U$141  [ZED#F9K230]  74.04,15.53 0 bottom
U$142  [L1#L2229]  70.71,9.91 270 top
U$143  [ANTENNA229]  69.44,10.69 270 top
U$144  [ZED#F9K230]  58.31,16.86 270 top
U$145  [#PPS#20]  54.36,23.24 0 top
U$146  [#TXO#CIPO#9]  87.5,30.99 0 bottom
U$147  [DEAD#RECKONING#GPS#BOARD#SILK#FINAL#JPG]  29.68,82 0 bottom
U$148  [DEAD#RECKONING#GPS#BOARD#SILK#FINAL#JPG]  10.73,72.49 270 top
U$149  [X1]  15.59,73.71 0 top
U$150  [Y2]  19.53,77.14 0 top
U$151  [Y2]  19.81,78.23 0 bottom
U$152  [Z0]  18.03,76.2 0 bottom
U$153  [Z0]  17.75,75.11 0 top
U$154  [PWR22]  31.26,66.37 0 top
U$155  [PPS21]  35.36,66.24 0 top
U$156  [GEO23]  39.09,66.44 0 top
U$157  [RTK24]  42.9,66.41 0 top
U$158  [#W##16]  46.56,74.17 0 top
U$159  [#W##15]  46.6,76.7 0 top
U$160  [#D##13]  46.65,79.24 0 top
U$161  [#D##14]  46.71,81.82 0 top
U$162  [#SCK#12]  46.27,84.33 0 top
U$163  [#CIPO#10]  45.89,86.83 0 top
U$164  [#COPI#9]  45.89,89.4 0 top
U$165  [#3V3#6]  46.15,94.51 0 top
U$166  [#5V#1]  46.64,96.95 0 top
U$167  [#GND#0]  46.03,99.53 0 top
U$168  [#GND#0]  28.43,109.49 270 top
U$169  [#TXO2#20]  38.58,109.03 270 top
U$170  [RX224]  36.07,109.79 270 top
U$171  [BLK225]  26.43,112.25 0 top
U$172  [GRN226]  43.37,112.23 0 top
U$173  [#GND#0]  10.84,99.5 0 top
U$174  [#3V3#6]  10.76,96.97 0 top
U$175  [#SDA#12]  10.81,94.43 0 top
U$176  [#SCL#13]  10.71,91.9 0 top
U$177  [#TXR#19]  10.88,89.33 0 top
U$178  [##RST##17]  10.81,86.88 0 top
U$179  [##SFBT##18]  11.21,84.29 0 top
U$180  [#INT#14]  10.57,81.75 0 top
U$181  [##CS##11]  46.66,91.92 0 top
U$182  [#3V3#6]  46.12,94.48 0 top
U$183  [#3V3#6]  46.13,94.48 0 bottom
U$184  [#5V#1]  46.63,96.94 0 bottom
U$185  [#GND#0]  46.03,99.53 0 bottom
U$186  [#SDA##CS##10]  44.67,91.92 0 bottom
U$187  [#RXI#COPI#8]  44.16,89.43 0 bottom
U$188  [#SCL#SCK#12]  44.46,84.3 0 bottom
U$189  [#D##6]  46.68,79.2 0 bottom
U$190  [#D##7]  46.69,81.76 0 bottom
U$191  [#W##4]  46.51,74.15 0 bottom
U$192  [#W##5]  46.57,76.68 0 bottom
U$193  [#GND#0]  10.83,99.51 0 bottom
U$194  [#3V3#6]  10.73,96.98 0 bottom
U$195  [#SDA#6]  10.83,94.49 0 bottom
U$196  [#SCL#7]  10.66,91.92 0 bottom
U$197  [#TXR#3]  10.87,89.37 0 bottom
U$198  [##RST##16]  10.77,86.89 0 bottom
U$199  [##SFBT##17]  11.21,84.31 0 bottom
U$200  [#INT#8]  10.6,81.7 0 bottom
U$201  [#PPS#0]  10.71,79.15 0 bottom
U$202  [#RTK#25]  42.89,65.91 0 bottom
U$203  [#GEO#24]  38.96,65.86 0 bottom
U$204  [#PPS#21]  35.28,65.87 0 bottom
U$205  [#PWR#23]  31.46,65.91 0 bottom
U$206  [#SPI#22]  17.86,89.93 90 bottom
U$207  [#I2C#23]  18.12,96.11 90 bottom
U$208  [#RXI2#227]  36.08,109.37 90 bottom
U$209  [#TXO2#1]  38.56,109.06 90 bottom
U$210  [#GND#0]  28.4,109.49 90 bottom
U$211  [BLK227]  26.37,112.25 0 bottom
U$212  [GRN228]  43.32,112.24 0 bottom
U$213  [GNSS#DEAD_RECKONING230]  29,73.8 0 bottom
U$214  [ZED#F9K230]  30.35,71.41 0 bottom
U$215  [L1#L2229]  27.02,65.79 270 top
U$216  [ANTENNA229]  25.75,66.57 270 top
U$217  [ZED#F9K230]  14.62,72.74 270 top
U$218  [#PPS#20]  10.67,79.12 0 top
U$219  [#TXO#CIPO#9]  43.81,86.87 0 bottom
U$220  [DEAD#RECKONING#GPS#BOARD#SILK#FINAL#JPG]  73.37,82 0 bottom
U$221  [DEAD#RECKONING#GPS#BOARD#SILK#FINAL#JPG]  54.41,72.49 270 top
U$222  [X1]  59.28,73.71 0 top
U$223  [Y2]  63.22,77.14 0 top
U$224  [Y2]  63.5,78.23 0 bottom
U$225  [Z0]  61.72,76.2 0 bottom
U$226  [Z0]  61.44,75.11 0 top
U$227  [PWR22]  74.95,66.37 0 top
U$228  [PPS21]  79.05,66.24 0 top
U$229  [GEO23]  82.78,66.44 0 top
U$230  [RTK24]  86.59,66.41 0 top
U$231  [#W##16]  90.25,74.17 0 top
U$232  [#W##15]  90.29,76.7 0 top
U$233  [#D##13]  90.34,79.24 0 top
U$234  [#D##14]  90.4,81.82 0 top
U$235  [#SCK#12]  89.96,84.33 0 top
U$236  [#CIPO#10]  89.58,86.83 0 top
U$237  [#COPI#9]  89.58,89.4 0 top
U$238  [#3V3#6]  89.84,94.51 0 top
U$239  [#5V#1]  90.33,96.95 0 top
U$240  [#GND#0]  89.72,99.53 0 top
U$241  [#GND#0]  72.12,109.49 270 top
U$242  [#TXO2#20]  82.27,109.03 270 top
U$243  [RX224]  79.76,109.79 270 top
U$244  [BLK225]  70.11,112.25 0 top
U$245  [GRN226]  87.06,112.23 0 top
U$246  [#GND#0]  54.53,99.5 0 top
U$247  [#3V3#6]  54.45,96.97 0 top
U$248  [#SDA#12]  54.5,94.43 0 top
U$249  [#SCL#13]  54.4,91.9 0 top
U$250  [#TXR#19]  54.57,89.33 0 top
U$251  [##RST##17]  54.5,86.88 0 top
U$252  [##SFBT##18]  54.9,84.29 0 top
U$253  [#INT#14]  54.26,81.75 0 top
U$254  [##CS##11]  90.35,91.92 0 top
U$255  [#3V3#6]  89.81,94.48 0 top
U$256  [#3V3#6]  89.82,94.48 0 bottom
U$257  [#5V#1]  90.32,96.94 0 bottom
U$258  [#GND#0]  89.72,99.53 0 bottom
U$259  [#SDA##CS##10]  88.36,91.92 0 bottom
U$260  [#RXI#COPI#8]  87.85,89.43 0 bottom
U$261  [#SCL#SCK#12]  88.15,84.3 0 bottom
U$262  [#D##6]  90.37,79.2 0 bottom
U$263  [#D##7]  90.38,81.76 0 bottom
U$264  [#W##4]  90.2,74.15 0 bottom
U$265  [#W##5]  90.26,76.68 0 bottom
U$266  [#GND#0]  54.52,99.51 0 bottom
U$267  [#3V3#6]  54.42,96.98 0 bottom
U$268  [#SDA#6]  54.52,94.49 0 bottom
U$269  [#SCL#7]  54.35,91.92 0 bottom
U$270  [#TXR#3]  54.56,89.37 0 bottom
U$271  [##RST##16]  54.46,86.89 0 bottom
U$272  [##SFBT##17]  54.9,84.31 0 bottom
U$273  [#INT#8]  54.29,81.7 0 bottom
U$274  [#PPS#0]  54.4,79.15 0 bottom
U$275  [#RTK#25]  86.58,65.91 0 bottom
U$276  [#GEO#24]  82.65,65.86 0 bottom
U$277  [#PPS#21]  78.97,65.87 0 bottom
U$278  [#PWR#23]  75.15,65.91 0 bottom
U$279  [#SPI#22]  61.55,89.93 90 bottom
U$280  [#I2C#23]  61.81,96.11 90 bottom
U$281  [#RXI2#227]  79.77,109.37 90 bottom
U$282  [#TXO2#1]  82.25,109.06 90 bottom
U$283  [#GND#0]  72.09,109.49 90 bottom
U$284  [BLK227]  70.06,112.25 0 bottom
U$285  [GRN228]  87.01,112.24 0 bottom
U$286  [GNSS#DEAD_RECKONING230]  72.69,73.8 0 bottom
U$287  [ZED#F9K230]  74.04,71.41 0 bottom
U$288  [L1#L2229]  70.71,65.79 270 top
U$289  [ANTENNA229]  69.44,66.57 270 top
U$290  [ZED#F9K230]  58.31,72.74 270 top
U$291  [#PPS#20]  54.36,79.12 0 top
U$292  [#TXO#CIPO#9]  87.5,86.87 0 bottom
U$293  [DEAD#RECKONING#GPS#BOARD#SILK#FINAL#JPG]  29.68,137.88 0 bottom
U$294  [DEAD#RECKONING#GPS#BOARD#SILK#FINAL#JPG]  10.73,128.37 270 top
U$295  [X1]  15.59,129.59 0 top
U$296  [Y2]  19.53,133.02 0 top
U$297  [Y2]  19.81,134.11 0 bottom
U$298  [Z0]  18.03,132.08 0 bottom
U$299  [Z0]  17.75,130.99 0 top
U$300  [PWR22]  31.26,122.25 0 top
U$301  [PPS21]  35.36,122.12 0 top
U$302  [GEO23]  39.09,122.32 0 top
U$303  [RTK24]  42.9,122.29 0 top
U$304  [#W##16]  46.56,130.05 0 top
U$305  [#W##15]  46.6,132.58 0 top
U$306  [#D##13]  46.65,135.12 0 top
U$307  [#D##14]  46.71,137.7 0 top
U$308  [#SCK#12]  46.27,140.21 0 top
U$309  [#CIPO#10]  45.89,142.71 0 top
U$310  [#COPI#9]  45.89,145.28 0 top
U$311  [#3V3#6]  46.15,150.39 0 top
U$312  [#5V#1]  46.64,152.83 0 top
U$313  [#GND#0]  46.03,155.41 0 top
U$314  [#GND#0]  28.43,165.37 270 top
U$315  [#TXO2#20]  38.58,164.91 270 top
U$316  [RX224]  36.07,165.66 270 top
U$317  [BLK225]  26.43,168.13 0 top
U$318  [GRN226]  43.37,168.11 0 top
U$319  [#GND#0]  10.84,155.38 0 top
U$320  [#3V3#6]  10.76,152.85 0 top
U$321  [#SDA#12]  10.81,150.31 0 top
U$322  [#SCL#13]  10.71,147.78 0 top
U$323  [#TXR#19]  10.88,145.21 0 top
U$324  [##RST##17]  10.81,142.76 0 top
U$325  [##SFBT##18]  11.21,140.17 0 top
U$326  [#INT#14]  10.57,137.63 0 top
U$327  [##CS##11]  46.66,147.8 0 top
U$328  [#3V3#6]  46.12,150.36 0 top
U$329  [#3V3#6]  46.13,150.36 0 bottom
U$330  [#5V#1]  46.63,152.82 0 bottom
U$331  [#GND#0]  46.03,155.41 0 bottom
U$332  [#SDA##CS##10]  44.67,147.8 0 bottom
U$333  [#RXI#COPI#8]  44.16,145.31 0 bottom
U$334  [#SCL#SCK#12]  44.46,140.18 0 bottom
U$335  [#D##6]  46.68,135.08 0 bottom
U$336  [#D##7]  46.69,137.64 0 bottom
U$337  [#W##4]  46.51,130.03 0 bottom
U$338  [#W##5]  46.57,132.56 0 bottom
U$339  [#GND#0]  10.83,155.39 0 bottom
U$340  [#3V3#6]  10.73,152.86 0 bottom
U$341  [#SDA#6]  10.83,150.37 0 bottom
U$342  [#SCL#7]  10.66,147.8 0 bottom
U$343  [#TXR#3]  10.87,145.25 0 bottom
U$344  [##RST##16]  10.77,142.77 0 bottom
U$345  [##SFBT##17]  11.21,140.19 0 bottom
U$346  [#INT#8]  10.6,137.58 0 bottom
U$347  [#PPS#0]  10.71,135.03 0 bottom
U$348  [#RTK#25]  42.89,121.79 0 bottom
U$349  [#GEO#24]  38.96,121.74 0 bottom
U$350  [#PPS#21]  35.28,121.75 0 bottom
U$351  [#PWR#23]  31.46,121.79 0 bottom
U$352  [#SPI#22]  17.86,145.81 90 bottom
U$353  [#I2C#23]  18.12,151.99 90 bottom
U$354  [#RXI2#227]  36.08,165.25 90 bottom
U$355  [#TXO2#1]  38.56,164.94 90 bottom
U$356  [#GND#0]  28.4,165.37 90 bottom
U$357  [BLK227]  26.37,168.13 0 bottom
U$358  [GRN228]  43.32,168.12 0 bottom
U$359  [GNSS#DEAD_RECKONING230]  29,129.68 0 bottom
U$360  [ZED#F9K230]  30.35,127.29 0 bottom
U$361  [L1#L2229]  27.02,121.67 270 top
U$362  [ANTENNA229]  25.75,122.45 270 top
U$363  [ZED#F9K230]  14.62,128.62 270 top
U$364  [#PPS#20]  10.67,135 0 top
U$365  [#TXO#CIPO#9]  43.81,142.75 0 bottom
U$366  [DEAD#RECKONING#GPS#BOARD#SILK#FINAL#JPG]  73.37,137.88 0 bottom
U$367  [DEAD#RECKONING#GPS#BOARD#SILK#FINAL#JPG]  54.41,128.37 270 top
U$368  [X1]  59.28,129.59 0 top
U$369  [Y2]  63.22,133.02 0 top
U$370  [Y2]  63.5,134.11 0 bottom
U$371  [Z0]  61.72,132.08 0 bottom
U$372  [Z0]  61.44,130.99 0 top
U$373  [PWR22]  74.95,122.25 0 top
U$374  [PPS21]  79.05,122.12 0 top
U$375  [GEO23]  82.78,122.32 0 top
U$376  [RTK24]  86.59,122.29 0 top
U$377  [#W##16]  90.25,130.05 0 top
U$378  [#W##15]  90.29,132.58 0 top
U$379  [#D##13]  90.34,135.12 0 top
U$380  [#D##14]  90.4,137.7 0 top
U$381  [#SCK#12]  89.96,140.21 0 top
U$382  [#CIPO#10]  89.58,142.71 0 top
U$383  [#COPI#9]  89.58,145.28 0 top
U$384  [#3V3#6]  89.84,150.39 0 top
U$385  [#5V#1]  90.33,152.83 0 top
U$386  [#GND#0]  89.72,155.41 0 top
U$387  [#GND#0]  72.12,165.37 270 top
U$388  [#TXO2#20]  82.27,164.91 270 top
U$389  [RX224]  79.76,165.66 270 top
U$390  [BLK225]  70.11,168.13 0 top
U$391  [GRN226]  87.06,168.11 0 top
U$392  [#GND#0]  54.53,155.38 0 top
U$393  [#3V3#6]  54.45,152.85 0 top
U$394  [#SDA#12]  54.5,150.31 0 top
U$395  [#SCL#13]  54.4,147.78 0 top
U$396  [#TXR#19]  54.57,145.21 0 top
U$397  [##RST##17]  54.5,142.76 0 top
U$398  [##SFBT##18]  54.9,140.17 0 top
U$399  [#INT#14]  54.26,137.63 0 top
U$400  [##CS##11]  90.35,147.8 0 top
U$401  [#3V3#6]  89.81,150.36 0 top
U$402  [#3V3#6]  89.82,150.36 0 bottom
U$403  [#5V#1]  90.32,152.82 0 bottom
U$404  [#GND#0]  89.72,155.41 0 bottom
U$405  [#SDA##CS##10]  88.36,147.8 0 bottom
U$406  [#RXI#COPI#8]  87.85,145.31 0 bottom
U$407  [#SCL#SCK#12]  88.15,140.18 0 bottom
U$408  [#D##6]  90.37,135.08 0 bottom
U$409  [#D##7]  90.38,137.64 0 bottom
U$410  [#W##4]  90.2,130.03 0 bottom
U$411  [#W##5]  90.26,132.56 0 bottom
U$412  [#GND#0]  54.52,155.39 0 bottom
U$413  [#3V3#6]  54.42,152.86 0 bottom
U$414  [#SDA#6]  54.52,150.37 0 bottom
U$415  [#SCL#7]  54.35,147.8 0 bottom
U$416  [#TXR#3]  54.56,145.25 0 bottom
U$417  [##RST##16]  54.46,142.77 0 bottom
U$418  [##SFBT##17]  54.9,140.19 0 bottom
U$419  [#INT#8]  54.29,137.58 0 bottom
U$420  [#PPS#0]  54.4,135.03 0 bottom
U$421  [#RTK#25]  86.58,121.79 0 bottom
U$422  [#GEO#24]  82.65,121.74 0 bottom
U$423  [#PPS#21]  78.97,121.75 0 bottom
U$424  [#PWR#23]  75.15,121.79 0 bottom
U$425  [#SPI#22]  61.55,145.81 90 bottom
U$426  [#I2C#23]  61.81,151.99 90 bottom
U$427  [#RXI2#227]  79.77,165.25 90 bottom
U$428  [#TXO2#1]  82.25,164.94 90 bottom
U$429  [#GND#0]  72.09,165.37 90 bottom
U$430  [BLK227]  70.06,168.13 0 bottom
U$431  [GRN228]  87.01,168.12 0 bottom
U$432  [GNSS#DEAD_RECKONING230]  72.69,129.68 0 bottom
U$433  [ZED#F9K230]  74.04,127.29 0 bottom
U$434  [L1#L2229]  70.71,121.67 270 top
U$435  [ANTENNA229]  69.44,122.45 270 top
U$436  [ZED#F9K230]  58.31,128.62 270 top
U$437  [#PPS#20]  54.36,135 0 top
U$438  [#TXO#CIPO#9]  87.5,142.75 0 bottom

## Library data of the parts
$1_25_$_2020-03-30_22-52-01-$1_25_$_2020-03-30_22-52-06 H1-H18 = SparkFun-Hardware
BT1-BT6 = SparkFun-Batteries; PROD_ID: BATT-14267
C1 C5-C7 C17-C20 C27-C30 C37-C40 C47-C50 C57-C60 = SparkFun-Capacitors; PROD_ID: CAP-14993
C2 C9 C10 C12-C14 C22-C24 C32-C34 C42-C44 C52-C54 = SparkFun-Capacitors; PROD_ID: CAP-12417
C3 C4 C15 C16 C25 C26 C35 C36 C45 C46 C55 C56 = SparkFun-Capacitors; PROD_ID: CAP-15061
C8 C11 C21 C31 C41 C51 = SparkFun-Capacitors; PROD_ID: CAP-15063
D1 D2 D16 D17 D25 D26 D34 D35 D43 D44 D52 D53 = SparkFun-DiscreteSemi; PROD_ID: DIO-15071
D3 D12 D21 D30 D39 D48 = SparkFun-IC-Power; PROD_ID: DIO-14084
D4 D11 D20 D29 D38 D47 = SparkFun-LED; PROD_ID: DIO-00819
D5-D7 D13-D15 D22-D24 D31-D33 D40-D42 D49-D51 = SparkFun-LED; PROD_ID: DIO-08575
D8 D10 D19 D28 D37 D46 = SparkFun-DiscreteSemi; PROD_ID: DIO-10955
D9 D18 D27 D36 D45 D54 = SparkFun-DiscreteSemi; DIGIKEY_PART: PESD0402-140CT-ND; MOUSE_PART: 650-PESD0402-140; PROD_ID: DIO-15359
E1-E6 = SparkFun-RF; PROD_ID: CONN-08289
E$1-E$4 FD1-FD24 LOGO1-LOGO18 = SparkFun-Aesthetics
E$5 E$6 = SparkFun-Retired
FB1-FB6 = SparkFun-Coils; MFG_PART: BLM15HB121SN1D; PROD_ID: NDUC-14206
GEO GEO1-GEO5 I2C I2C1-I2C5 PPS PPS1-PPS5 PWR PWR1-PWR5 RTK RTK1-RTK5 SPI SPI1-SPI5 = SparkFun-Jumpers
J1 J3 J4 J10 J13 J16 J19 J22 J25 J28 J31 J34 = SparkFun-Connectors; PROD_ID: CONN-13694
J2 J9 J15 J21 J27 J33 = SparkFun-Connectors; PROD_ID: CONN-14122
J5-J8 J11 J12 J14 J17 J18 J20 J23 J24 J26 J29 J30 J32 J35 J36 TP1-TP6 = SparkFun-Connectors
R1 R2 R24 R27 R39 R41 R51 R63 R65 R75 R87 R89 R99 R111 R113 R123 R135 R137 = SparkFun-Resistors; PROD_ID: RES-07851
R3 R36 R60 R84 R108 R132 = SparkFun-Resistors; PROD_ID: RES-13495
R4 R7 R43 R44 R67 R68 R91 R92 R115 R116 R139 R140 = SparkFun-Resistors; PROD_ID: RES-13860
R5 R6 R40 R42 R64 R66 R88 R90 R112 R114 R136 R138 = SparkFun-Resistors; PROD_ID: RES-07869
R8-R11 R45-R48 R69-R72 R93-R96 R117-R120 R141-R144 = SparkFun-Resistors; PROD_ID: RES-15081
R12 R13 R35 R37 R59 R61 R83 R85 R107 R109 R131 R133 = SparkFun-Resistors; PROD_ID: RES-08270
R14 R15 R29 R30 R53 R54 R77 R78 R101 R102 R125 R126 = SparkFun-Resistors; PROD_ID: RES-14340
R16 R23 R25 R26 R49 R50 R73 R74 R97 R98 R121 R122 = SparkFun-Resistors; PROD_ID: RES-15343
R17-R20 R28 R33 R34 R38 R52 R57 R58 R62 R76 R81 R82 R86 R100 R105 R106 R110 R124 R129 R130 R134 = SparkFun-Resistors; PROD_ID: RES-14342
R21 R22 R31 R32 R55 R56 R79 R80 R103 R104 R127 R128 = SparkFun-Resistors; PROD_ID: RES-09334
U1 U8 U13 U18 U23 U28 = SparkFun-DiscreteSemi
U2 U7 U12 U17 U22 U27 = f9k; PROD_ID: IC-14475
U3 U4 U9 U10 U14 U15 U19 U20 U24 U25 U29 U30 = SparkFun-IC-Amplifiers; PROD_ID: IC-15068
U5 U6 U11 U16 U21 U26 = SparkFun-IC-Power; PROD_ID: VREG-12457
U$1-U$18 U$21-U$26 U$36-U$39 U$43 U$44 U$46-U$49 U$51 U$53-U$55 U$58 U$59 U$61 U$62 U$64 U$65 U$67-U$69 U$71-U$73 U$81-U$101 U$104-U$106 U$108-U$112 U$120-U$123 U$127 U$129-U$135 U$137-U$145 U$154-U$174 U$177-U$179 U$181-U$185 U$193-U$196 U$200 U$202-U$208 U$210-U$218 U$227-U$247 U$250-U$252 U$254-U$258 U$266-U$269 U$273 U$275-U$281 U$283-U$291 U$300-U$320 U$323-U$325 U$327-U$331 U$339-U$342 U$346 U$348-U$354 U$356-U$364 U$373-U$393 U$396-U$398 U$400-U$404 U$412-U$415 U$419 U$421-U$427 U$429-U$437 = silk
U$19 U$29 U$147 U$220 U$293 U$366 = Dead#Reckoning#GPS#board#silk#FINAL#png
U$20 U$75 U$148 U$221 U$294 U$367 = Dead#Reckoning#GPS#board#silk#FINALSMALL
U$27 U$28 U$30 U$31 U$33-U$35 U$40-U$42 U$45 U$56 U$60 U$66 U$70 U$74 U$102 U$103 U$107 U$113-U$119 U$124-U$126 U$128 U$136 U$146 U$175 U$176 U$180 U$186-U$192 U$197-U$199 U$201 U$209 U$219 U$248 U$249 U$253 U$259-U$265 U$270-U$272 U$274 U$282 U$292 U$321 U$322 U$326 U$332-U$338 U$343-U$345 U$347 U$355 U$365 U$394 U$395 U$399 U$405-U$411 U$416-U$418 U$420 U$428 U$438 = silkbot
U$32 U$50 U$52 U$57 U$63 U$76-U$80 U$149-U$153 U$222-U$226 U$295-U$299 U$368-U$372 = Orientation